# Altium PCB 3x3_V2_Pan.PcbDoc
Units mm, origin at the board's own origin, x right, y up, seen from the top; angles counter-clockwise.
Board outline 150 x 115 mm, 2 copper layers (Top Layer, Bottom Layer); 24 components, 11 nets, 224 pads, 0 vias.
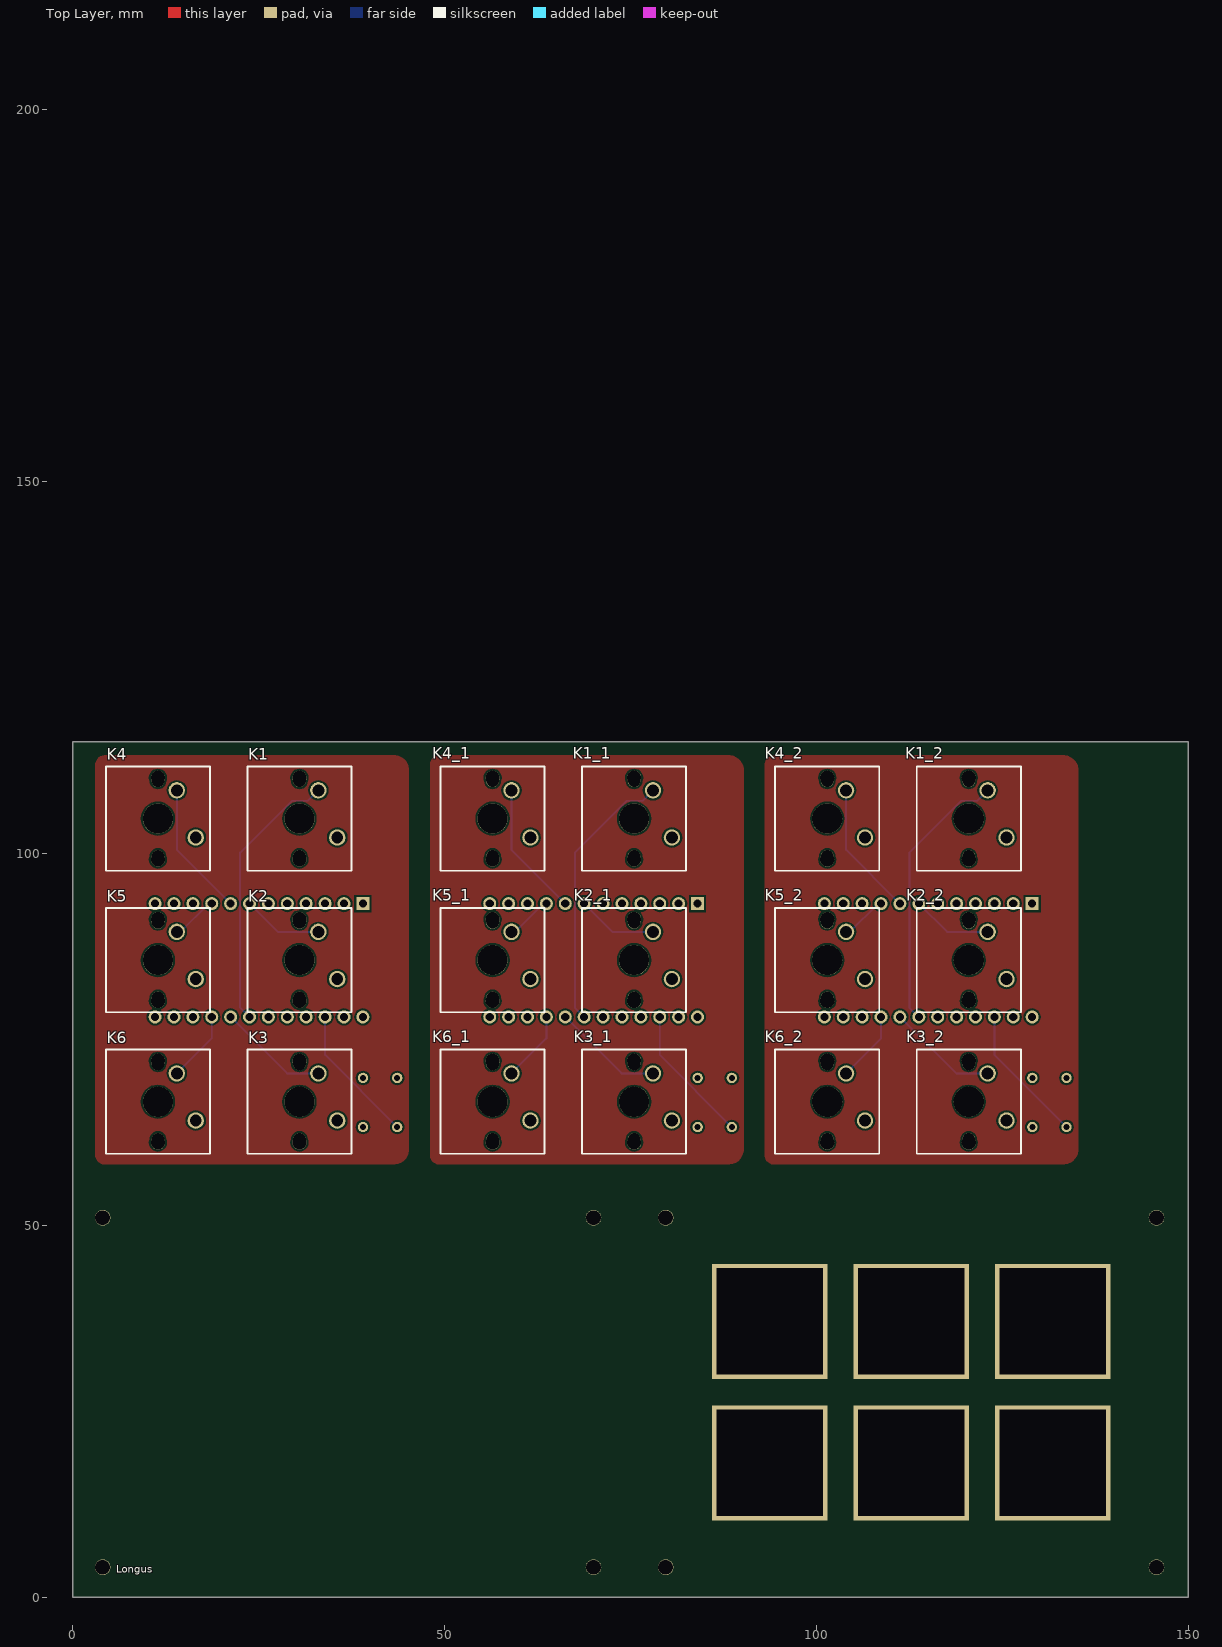
[diagram p0: Top Layer view]
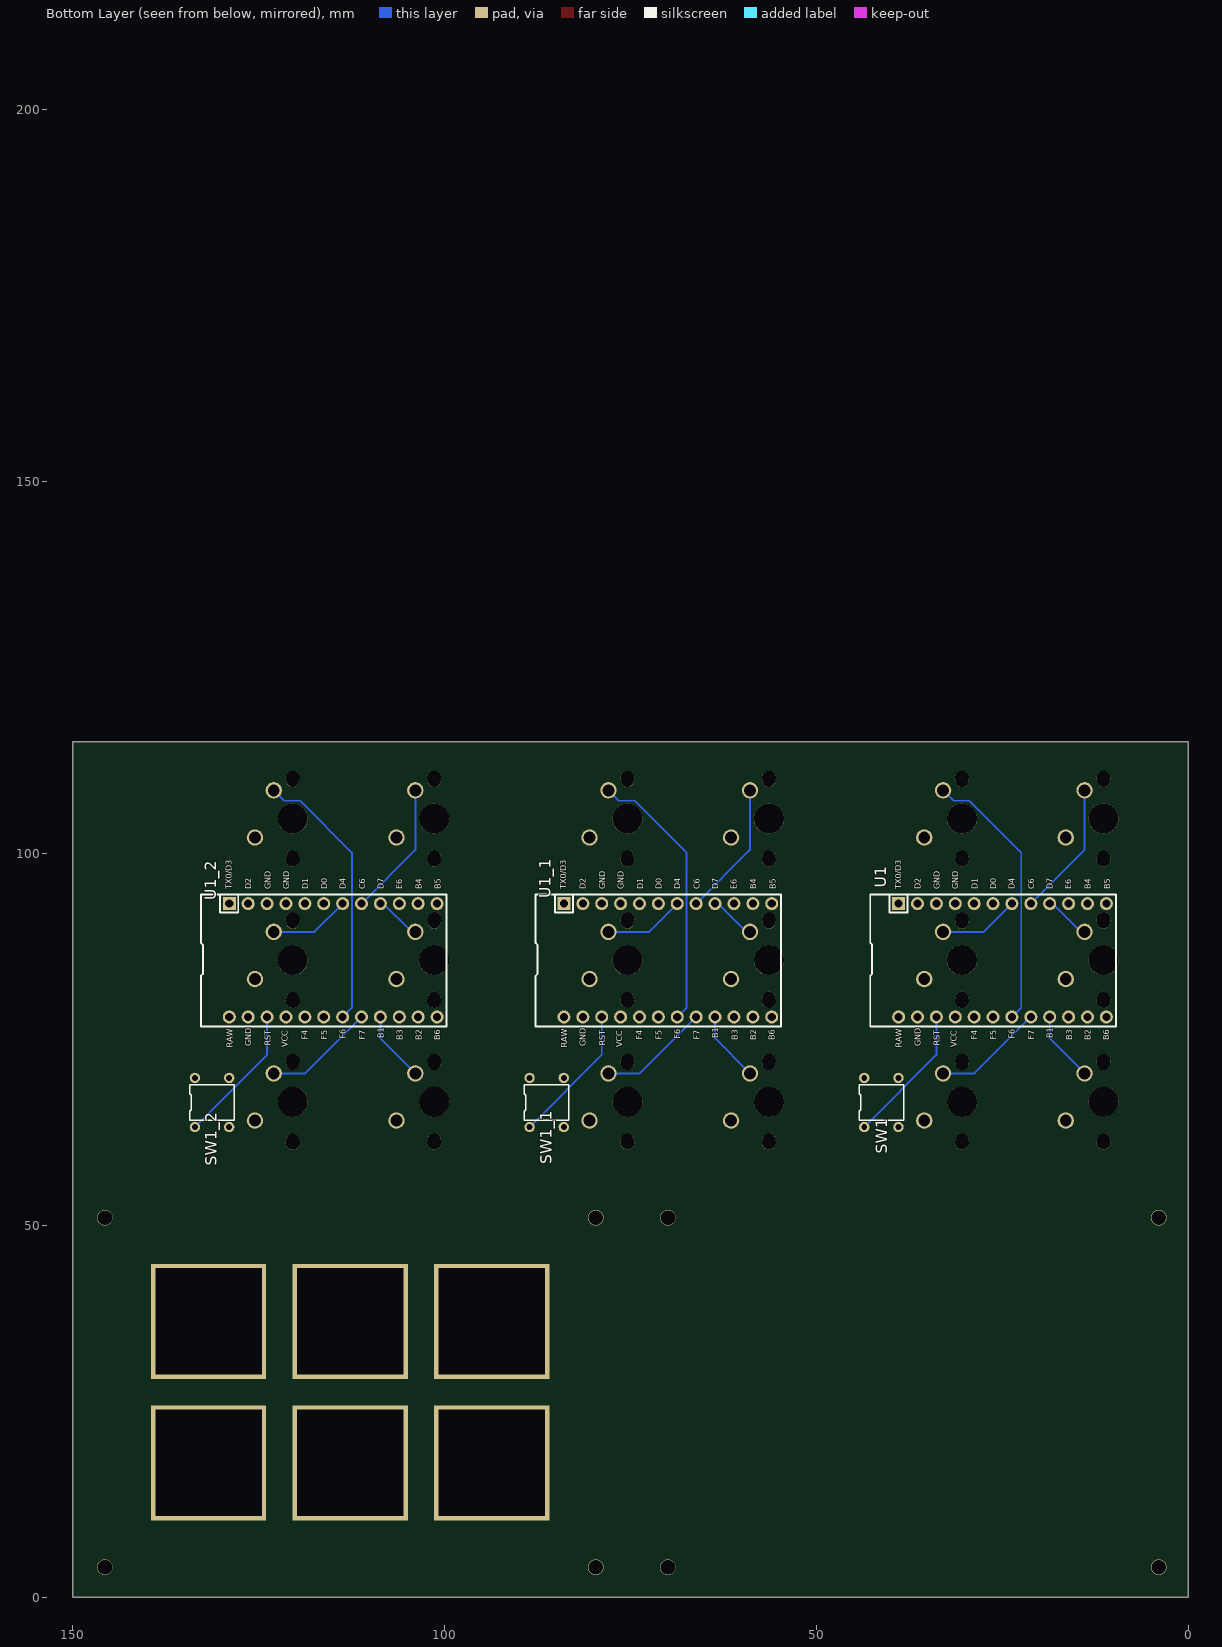
[diagram p1: Bottom Layer view, seen from below]

## Layer stack, top to bottom
Top Solder: solder mask 0.0102, Solder Resist, Dk 3.5
Top Layer: signal copper 0.0356
Dielectric 1: dielectric 0.32, FR-4, Dk 4.8
Bottom Layer: signal copper 0.0356
Bottom Solder: solder mask 0.0102, Solder Resist, Dk 3.5

## Board outline
0,0 150,0 150,115 0,115

## Design rules (kind name [scope] priority, off if disabled: settings)
Clearance [All] p1: gap=0.254 ignorepadtopadclearanceinfootprint=FALSE except(0: Arc-Hole Track-Hole SMDPad-Hole THPad-Hole Via-Hole Fill-Hole Poly-Hole Region-Hole Text-Hole)
PolygonConnect [All] p1: connectstyle=Relief reliefconductorwidth=0.254 reliefentries=4 polygonreliefangle="90 Angle" airgapwidth=0.254
RoutingVias [All] p1: holewidth=0.711 width=1.27 viastyle="Through Hole" minholewidth=0.711 minwidth=1.27 maxholewidth=0.711 maxwidth=1.27
SolderMaskExpansion [All] p1: expansion=0.102 istentingtop=FALSE
Width [All] p1: maxlimit=0.254 minlimit=0.254 preferedwidth=0.254
30 further rules are at their usual default settings.

## Classes and differential pairs
component class Macropadmod: SW?

## Components (designator, comment, footprint, x,y, rotation, side; value= is the part's Value field where it differs from the comment)
K1 "KEYSW-canadian_parts" Socket 23.455,111.715 r270 top
K1_1 "KEYSW-canadian_parts" Socket 68.455,111.715 r270 top (schematic designator K1)
K1_2 "KEYSW-canadian_parts" Socket 113.455,111.715 r270 top (schematic designator K1)
K2 "KEYSW-canadian_parts" Socket 23.455,92.685 r270 top
K2_1 "KEYSW-canadian_parts" Socket 68.455,92.685 r270 top (schematic designator K2)
K2_2 "KEYSW-canadian_parts" Socket 113.455,92.685 r270 top (schematic designator K2)
K3 "KEYSW-canadian_parts" Socket 23.455,73.655 r270 top
K3_1 "KEYSW-canadian_parts" Socket 68.455,73.655 r270 top (schematic designator K3)
K3_2 "KEYSW-canadian_parts" Socket 113.455,73.655 r270 top (schematic designator K3)
K4 "KEYSW-canadian_parts" Socket 4.425,111.715 r270 top
K4_1 "KEYSW-canadian_parts" Socket 49.425,111.715 r270 top (schematic designator K4)
K4_2 "KEYSW-canadian_parts" Socket 94.425,111.715 r270 top (schematic designator K4)
K5 "KEYSW-canadian_parts" Socket 4.425,92.685 r270 top
K5_1 "KEYSW-canadian_parts" Socket 49.425,92.685 r270 top (schematic designator K5)
K5_2 "KEYSW-canadian_parts" Socket 94.425,92.685 r270 top (schematic designator K5)
K6 "KEYSW-canadian_parts" Socket 4.425,73.655 r270 top
K6_1 "KEYSW-canadian_parts" Socket 49.425,73.655 r270 top (schematic designator K6)
K6_2 "KEYSW-canadian_parts" Socket 94.425,73.655 r270 top (schematic designator K6)
SW1 "SW_Push" RESET 37.9,64.7 r0 bottom
SW1_1 "SW_Push" RESET 82.9,64.7 r0 bottom (schematic designator SW1)
SW1_2 "SW_Push" RESET 127.9,64.7 r0 bottom (schematic designator SW1)
U1 "ProMicro-keebio" PRO-MICRO 38.98,78 r90 bottom
U1_1 "ProMicro-keebio" PRO-MICRO 83.98,78 r90 bottom (schematic designator U1)
U1_2 "ProMicro-keebio" PRO-MICRO 128.98,78 r90 bottom (schematic designator U1)

## Footprints (in the part's own frame and the unit in brackets; to place one, negate y for a bottom-side part, rotate by r counter-clockwise, add the part's x,y. Pads: shape width x height; smd on the part's side, far side on the other; paste and mask are expansions set on the pad)
PRO-MICRO [mm]
  rect 1.753x1.753 hole 1.092: 1(15.24,0)
  round 1.753 hole 1.092: 2(15.24,-2.54) 3(15.24,-5.08) 4(15.24,-7.62) 5(15.24,-10.16) 6(15.24,-12.7) 7(15.24,-15.24) 8(15.24,-17.78) 9(15.24,-20.32) 10(15.24,-22.86) 11(15.24,-25.4) 12(15.24,-27.94) 13(0,-27.94) 14(0,-25.4) 15(0,-22.86) 16(0,-20.32) 17(0,-17.78) 18(0,-15.24) 19(0,-12.7) 20(0,-10.16) 21(0,-7.62) 22(0,-5.08) 23(0,-2.54) 24(0,0)
  silkscreen extent -1.27,-29.21 16.48,3.81
RESET [mm]
  round 1.4 hole 0.8: 1(5.7,1.5) 2(5.7,-5.1) 3(1.1,1.5) 4(1.1,-5.1)
  silkscreen extent 0.4,-4.2 6.4,0.6
Socket [mm]
  round 2.2 hole 1.6: 1(3.24,9.54) 2(9.59,12.08)
  round 1.9 hole 1.9: 3(1.55,7) 3(12.55,7)
  round 1.7 hole 1.7: 3(1.97,7) 3(12.13,7)
  round 4.05 hole 4.05: 3(7.05,7)
  silkscreen extent 0.05,0 14.05,14

## Free pads (board coordinates)
  round 2.1 hole 2: 3(3.995,4.003) 3(3.995,51.003) 3(69.995,4.003) 3(69.995,51.003) 3(79.7,4.003) 3(79.7,51.003) 3(145.7,4.003) 3(145.7,51.003)
  rect 15.5x15.5 hole 14.25 square: 4(93.7,18.033) 4(93.7,37.063) 4(112.73,18.033) 4(112.73,37.063) 4(131.76,18.033) 4(131.76,37.063)

## Nets (pads, with @x,y where several pads share a name; then routed paths per layer and width w, separated by ;. In a path a pad name is that pad's centre, name@x,y a point inside that pad or via, vN(x,y) a via of type N, cw(c..) or ccw(c..) an arc to the next point about the centre after c; other vN are vias at no path point)
GND: 
NetK1_1: 
NetK2_1: 
NetK3_1: 
NetK4_1: 
NetK5_1: 
NetK6_1: 
NetK7_1: 
NetK8_1: 
NetK9_1: 
NetSW1_1: 
pads on no net: K1.1 K1.2 K1.3 K1_1.1 K1_1.2 K1_1.3 K1_2.1 K1_2.2 K1_2.3 K2.1 K2.2 K2.3 K2_1.1 K2_1.2 K2_1.3 K2_2.1 K2_2.2 K2_2.3 K3.1 K3.2 K3.3 K3_1.1 K3_1.2 K3_1.3 K3_2.1 K3_2.2 K3_2.3 K4.1 K4.2 K4.3 K4_1.1 K4_1.2 K4_1.3 K4_2.1 K4_2.2 K4_2.3 K5.1 K5.2 K5.3 K5_1.1 K5_1.2 K5_1.3 K5_2.1 K5_2.2 K5_2.3 K6.1 K6.2 K6.3 K6_1.1 K6_1.2 K6_1.3 K6_2.1 K6_2.2 K6_2.3 SW1.1 SW1.2 SW1.3 SW1.4 SW1_1.1 SW1_1.2 SW1_1.3 SW1_1.4 SW1_2.1 SW1_2.2 SW1_2.3 SW1_2.4 U1.1 U1.2 U1.3 U1.4 U1.5 U1.6 U1.7 U1.8 U1.9 U1.10 U1.11 U1.12 U1.13 U1.14 U1.15 U1.16 U1.17 U1.18 U1.19 U1.20 U1.21 U1.22 U1.23 U1.24 U1_1.1 U1_1.2 U1_1.3 U1_1.4 U1_1.5 U1_1.6 U1_1.7 U1_1.8 U1_1.9 U1_1.10 U1_1.11 U1_1.12 U1_1.13 U1_1.14 U1_1.15 U1_1.16 U1_1.17 U1_1.18 U1_1.19 U1_1.20 U1_1.21 U1_1.22 U1_1.23 U1_1.24 U1_2.1 U1_2.2 U1_2.3 U1_2.4 U1_2.5 U1_2.6 U1_2.7 U1_2.8 U1_2.9 U1_2.10 U1_2.11 U1_2.12 U1_2.13 U1_2.14 U1_2.15 U1_2.16 U1_2.17 U1_2.18 U1_2.19 U1_2.20 U1_2.21 U1_2.22 U1_2.23 U1_2.24
copper on no net: | length 345.6
  Bottom Layer w0.254: 13.965,70.415 18.66,75.11 18.66,78 ; 13.965,89.445 14.459,89.445 18.254,93.24 18.66,93.24 ; 13.965,108.475 13.965,100.475 21.2,93.24 ; 21.2,78 28.785,70.415 32.995,70.415 ; 23.74,78 22.483,79.257 22.483,100.095 29.458,107.071 31.591,107.071 32.995,108.475 ; 23.74,93.24 27.535,89.445 32.995,89.445 ; 33.9,78 33.9,72.9 43.6,63.2 ; 58.965,70.415 63.66,75.11 63.66,78 ; 58.965,89.445 59.459,89.445 63.254,93.24 63.66,93.24 ; 58.965,108.475 58.965,100.475 66.2,93.24 ; 66.2,78 73.785,70.415 77.995,70.415 ; 68.74,78 67.482,79.257 67.482,100.095 74.458,107.071 76.591,107.071 77.995,108.475 ; 68.74,93.24 72.535,89.445 77.995,89.445 ; 78.9,78 78.9,72.9 88.6,63.2 ; 103.965,70.415 108.66,75.11 108.66,78 ; 103.965,89.445 104.459,89.445 108.254,93.24 108.66,93.24 ; 103.965,108.475 103.965,100.475 111.2,93.24 ; 111.2,78 118.785,70.415 122.995,70.415 ; 113.74,78 112.483,79.257 112.483,100.095 119.458,107.071 121.591,107.071 122.995,108.475 ; 113.74,93.24 117.535,89.445 122.995,89.445 ; 123.9,78 123.9,72.9 133.6,63.2

## Polygon pours and split planes (outlines as drawn)
no net on Top Layer "NONET_L01_P004" (solid, pour order 4): 133.175,113.175 cw(c133.175,111.175) 135.175,111.175 135.175,60.2 cw(c133.15,60.2) 133.15,58.175 94.275,58.175 cw(c94.275,59.425) 93.025,59.425 93.025,111.9 cw(c94.3,111.9) 94.3,113.175
no net on Top Layer "NONET_L01_P002" (solid, pour order 2): 88.175,113.175 cw(c88.175,111.175) 90.175,111.175 90.175,60.2 cw(c88.15,60.2) 88.15,58.175 49.275,58.175 cw(c49.275,59.425) 48.025,59.425 48.025,111.9 cw(c49.3,111.9) 49.3,113.175
no net on Top Layer "NONET_L01_P000" (solid, pour order 0): 43.175,113.175 cw(c43.175,111.175) 45.175,111.175 45.175,60.2 cw(c43.15,60.2) 43.15,58.175 4.275,58.175 cw(c4.275,59.425) 3.025,59.425 3.025,111.9 cw(c4.3,111.9) 4.3,113.175
no net on Bottom Layer "NONET_L02_P005" (solid, pour order 5): 111,74.125
no net on Bottom Layer "NONET_L02_P003" (solid, pour order 3): 66,74.125
no net on Bottom Layer "NONET_L02_P001" (solid, pour order 1): 21,74.125

## Other copper
Top Layer:
  region: 146.878,207.896

## Silkscreen, mask and mechanical layers (free items; w line width, h text height)
Top Overlay:
  text "Longus" at 5.794,3.287 h1
Mechanical 1:
  lines w0.254: 4.268,58.169 43.143,58.169 ; 4.268,58.172 cw(c4.268,59.414) 3.025,59.414 3.027,111.9 cw(c4.3,111.9) 4.3,113.173 43.171,113.173 cw(c43.171,111.167) 45.177,111.167 45.177,60.194 cw(c43.143,60.194) 43.143,58.16 ; 5.153,0.127 cw(c5.153,5.153) 0.127,5.153 0.127,49.976 cw(c5.158,49.976) 5.158,55.008 ; 5.153,0.13 69.04,0.13 ; 5.158,55.003 69.018,55.003 ; 49.268,58.169 88.143,58.169 ; 49.268,58.172 cw(c49.268,59.414) 48.025,59.414 48.027,111.9 cw(c49.3,111.9) 49.3,113.173 88.171,113.173 cw(c88.171,111.167) 90.177,111.167 90.177,60.194 cw(c88.143,60.194) 88.143,58.16 ; 68.964,54.988 cw(c68.964,49.96) 73.992,49.96 ; 68.975,0.131 ccw(c68.975,5.157) 74.001,5.157 ; 73.995,5.151 73.995,49.971 ; 80.858,0.127 cw(c80.858,5.153) 75.832,5.153 75.832,49.976 cw(c80.863,49.976) 80.863,55.008 ; 80.858,0.13 144.745,0.13 ; 80.863,55.003 144.723,55.003 ; 94.268,58.169 133.143,58.169 ; 94.268,58.172 cw(c94.268,59.414) 93.025,59.414 93.027,111.9 cw(c94.3,111.9) 94.3,113.173 133.171,113.173 cw(c133.171,111.167) 135.177,111.167 135.177,60.194 cw(c133.143,60.194) 133.143,58.16 ; 144.669,54.988 cw(c144.669,49.96) 149.697,49.96 ; 144.68,0.131 ccw(c144.68,5.157) 149.706,5.157 ; 149.7,5.151 149.7,49.971

## Text inside footprints (layer, text, board x,y; h text height)
U1: Bottom Overlay "F6" at 23.33,75.05 h0.8 r270; Bottom Overlay "GND" at 33.43,95.15 h0.8 r270; Bottom Overlay "RAW" at 38.53,73.85 h0.8 r270; Bottom Overlay "GND" at 36.03,74.05 h0.8 r270; Bottom Overlay "RST" at 33.43,74.15 h0.8 r270; Bottom Overlay "VCC" at 31.13,73.95 h0.8 r270; Bottom Overlay "F4" at 28.43,74.95 h0.8 r270; Bottom Overlay "F5" at 25.83,74.95 h0.8 r270; Bottom Overlay "F7" at 20.73,74.95 h0.8 r270; Bottom Overlay "B1" at 18.23,75.15 h0.8 r270; Bottom Overlay "B3" at 15.63,74.85 h0.8 r270; Bottom Overlay "B2" at 13.13,74.85 h0.8 r270; Bottom Overlay "B6" at 10.63,74.85 h0.8 r270; Bottom Overlay "D2" at 36.03,95.15 h0.8 r270; Bottom Overlay "GND" at 30.93,95.15 h0.8 r270; Bottom Overlay "D1" at 28.33,95.15 h0.8 r270; Bottom Overlay "D0" at 25.83,95.15 h0.8 r270; Bottom Overlay "D4" at 23.33,95.15 h0.8 r270; Bottom Overlay "C6" at 20.73,95.15 h0.8 r270; Bottom Overlay "D7" at 18.23,95.15 h0.8 r270; Bottom Overlay "TX0/D3" at 38.644,95.15 h0.8 r270; Bottom Overlay "E6" at 15.73,95.15 h0.8 r270; Bottom Overlay "B4" at 13.13,95.15 h0.8 r270; Bottom Overlay "B5" at 10.53,95.15 h0.8 r270
U1_1: Bottom Overlay "F6" at 68.33,75.05 h0.8 r270; Bottom Overlay "GND" at 78.43,95.15 h0.8 r270; Bottom Overlay "RAW" at 83.53,73.85 h0.8 r270; Bottom Overlay "GND" at 81.03,74.05 h0.8 r270; Bottom Overlay "RST" at 78.43,74.15 h0.8 r270; Bottom Overlay "VCC" at 76.13,73.95 h0.8 r270; Bottom Overlay "F4" at 73.43,74.95 h0.8 r270; Bottom Overlay "F5" at 70.83,74.95 h0.8 r270; Bottom Overlay "F7" at 65.73,74.95 h0.8 r270; Bottom Overlay "B1" at 63.23,75.15 h0.8 r270; Bottom Overlay "B3" at 60.63,74.85 h0.8 r270; Bottom Overlay "B2" at 58.13,74.85 h0.8 r270; Bottom Overlay "B6" at 55.63,74.85 h0.8 r270; Bottom Overlay "D2" at 81.03,95.15 h0.8 r270; Bottom Overlay "GND" at 75.93,95.15 h0.8 r270; Bottom Overlay "D1" at 73.33,95.15 h0.8 r270; Bottom Overlay "D0" at 70.83,95.15 h0.8 r270; Bottom Overlay "D4" at 68.33,95.15 h0.8 r270; Bottom Overlay "C6" at 65.73,95.15 h0.8 r270; Bottom Overlay "D7" at 63.23,95.15 h0.8 r270; Bottom Overlay "TX0/D3" at 83.644,95.15 h0.8 r270; Bottom Overlay "E6" at 60.73,95.15 h0.8 r270; Bottom Overlay "B4" at 58.13,95.15 h0.8 r270; Bottom Overlay "B5" at 55.53,95.15 h0.8 r270
U1_2: Bottom Overlay "F6" at 113.33,75.05 h0.8 r270; Bottom Overlay "GND" at 123.43,95.15 h0.8 r270; Bottom Overlay "RAW" at 128.53,73.85 h0.8 r270; Bottom Overlay "GND" at 126.03,74.05 h0.8 r270; Bottom Overlay "RST" at 123.43,74.15 h0.8 r270; Bottom Overlay "VCC" at 121.13,73.95 h0.8 r270; Bottom Overlay "F4" at 118.43,74.95 h0.8 r270; Bottom Overlay "F5" at 115.83,74.95 h0.8 r270; Bottom Overlay "F7" at 110.73,74.95 h0.8 r270; Bottom Overlay "B1" at 108.23,75.15 h0.8 r270; Bottom Overlay "B3" at 105.63,74.85 h0.8 r270; Bottom Overlay "B2" at 103.13,74.85 h0.8 r270; Bottom Overlay "B6" at 100.63,74.85 h0.8 r270; Bottom Overlay "D2" at 126.03,95.15 h0.8 r270; Bottom Overlay "GND" at 120.93,95.15 h0.8 r270; Bottom Overlay "D1" at 118.33,95.15 h0.8 r270; Bottom Overlay "D0" at 115.83,95.15 h0.8 r270; Bottom Overlay "D4" at 113.33,95.15 h0.8 r270; Bottom Overlay "C6" at 110.73,95.15 h0.8 r270; Bottom Overlay "D7" at 108.23,95.15 h0.8 r270; Bottom Overlay "TX0/D3" at 128.644,95.15 h0.8 r270; Bottom Overlay "E6" at 105.73,95.15 h0.8 r270; Bottom Overlay "B4" at 103.13,95.15 h0.8 r270; Bottom Overlay "B5" at 100.53,95.15 h0.8 r270